# Altium PCB REF-Unit.PcbDoc
Units mm, origin at the board's own origin, x right, y up, seen from the top; angles counter-clockwise.
Board outline 28.96 x 18.29 mm, 4 copper layers (Top1, Signal2, Gnd3, Bottom4), stack 1.043 mm thick; 43 components, 73 nets, 248 pads, 219 vias.
Unrouted connection lines stored in the file: 57.
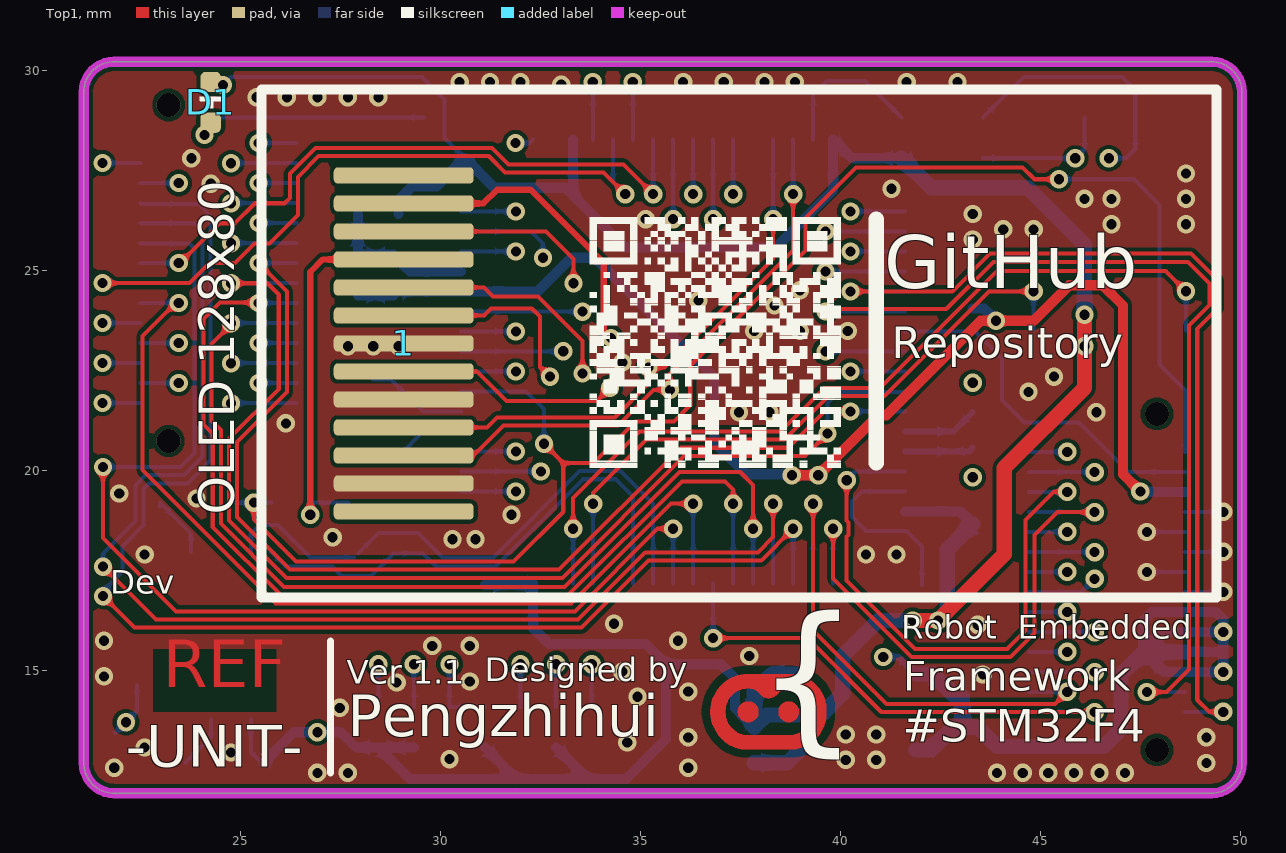
[diagram p0: Top1 view]
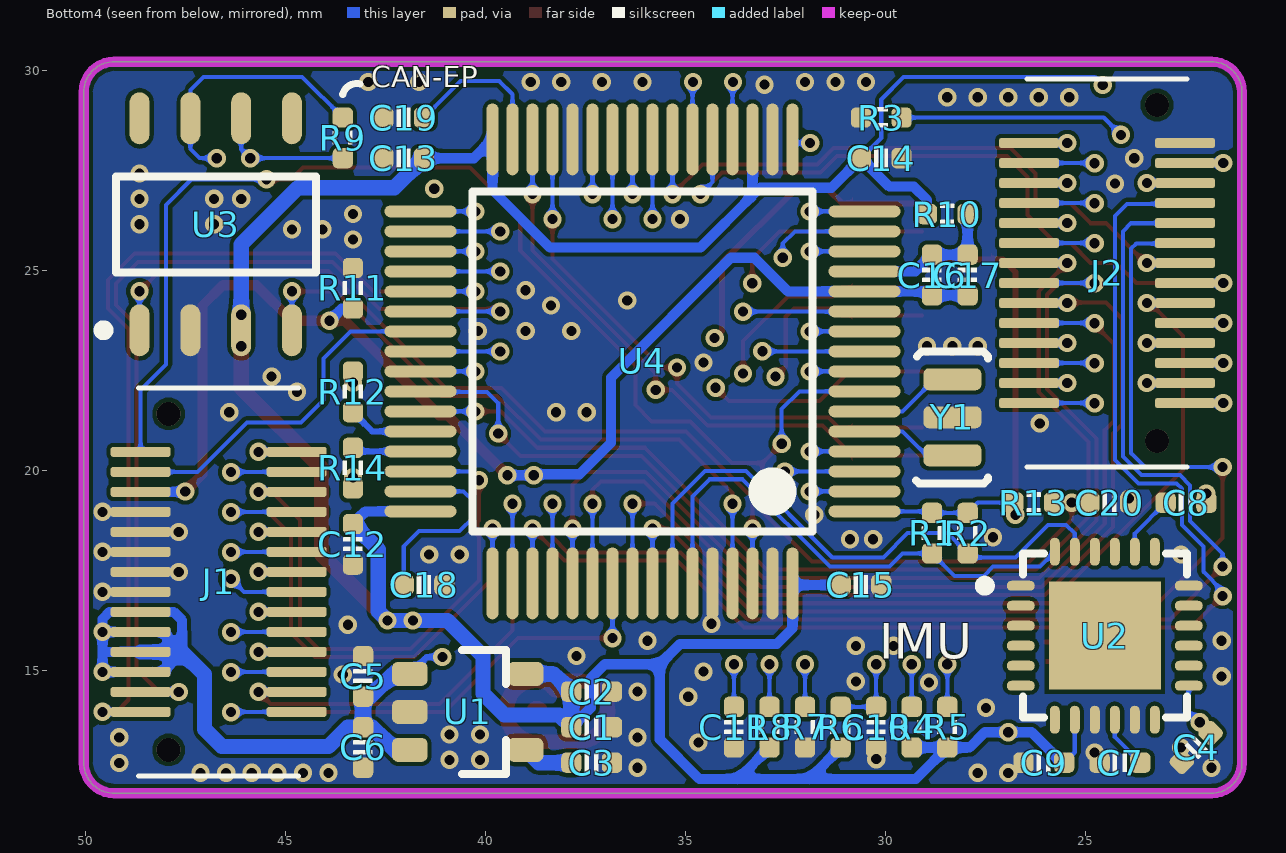
[diagram p1: Bottom4 view, seen from below]
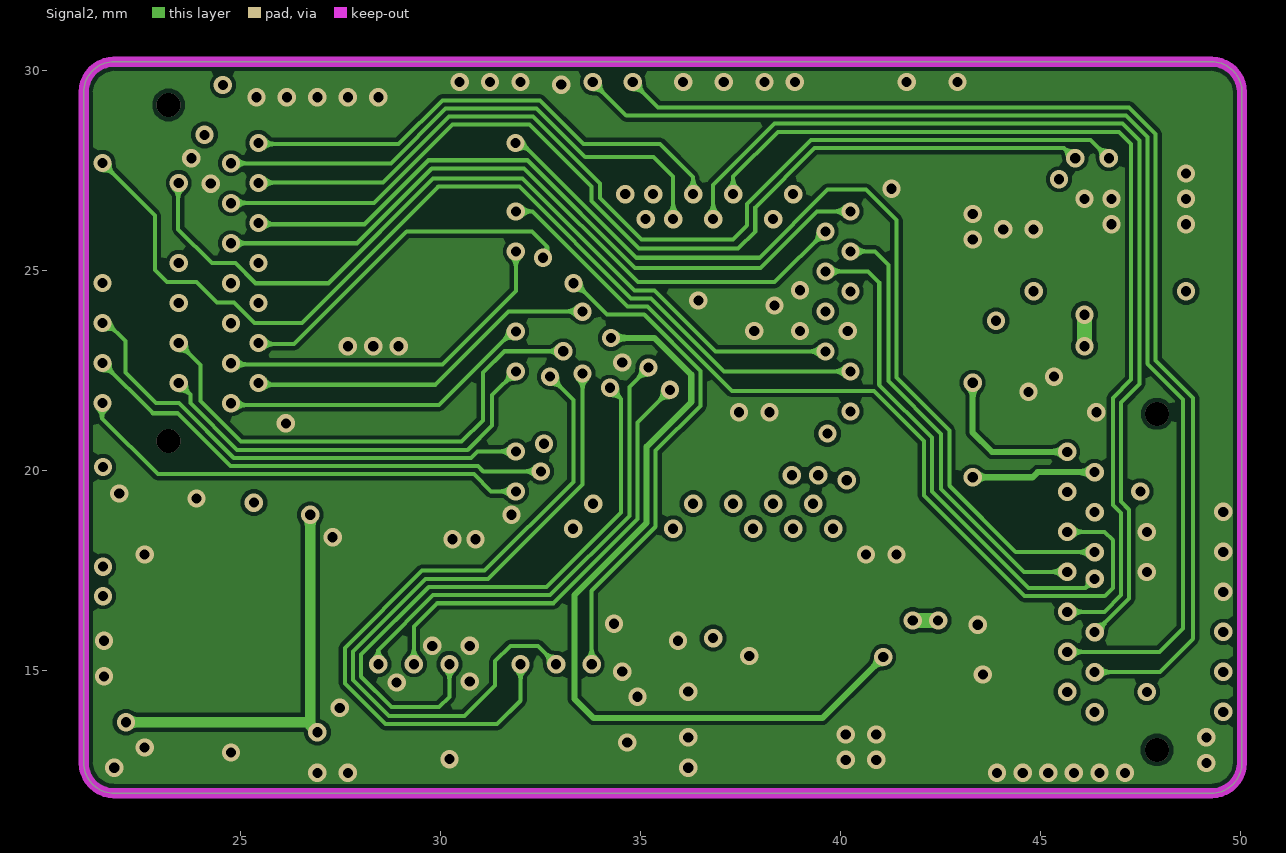
[diagram p2: Signal2]
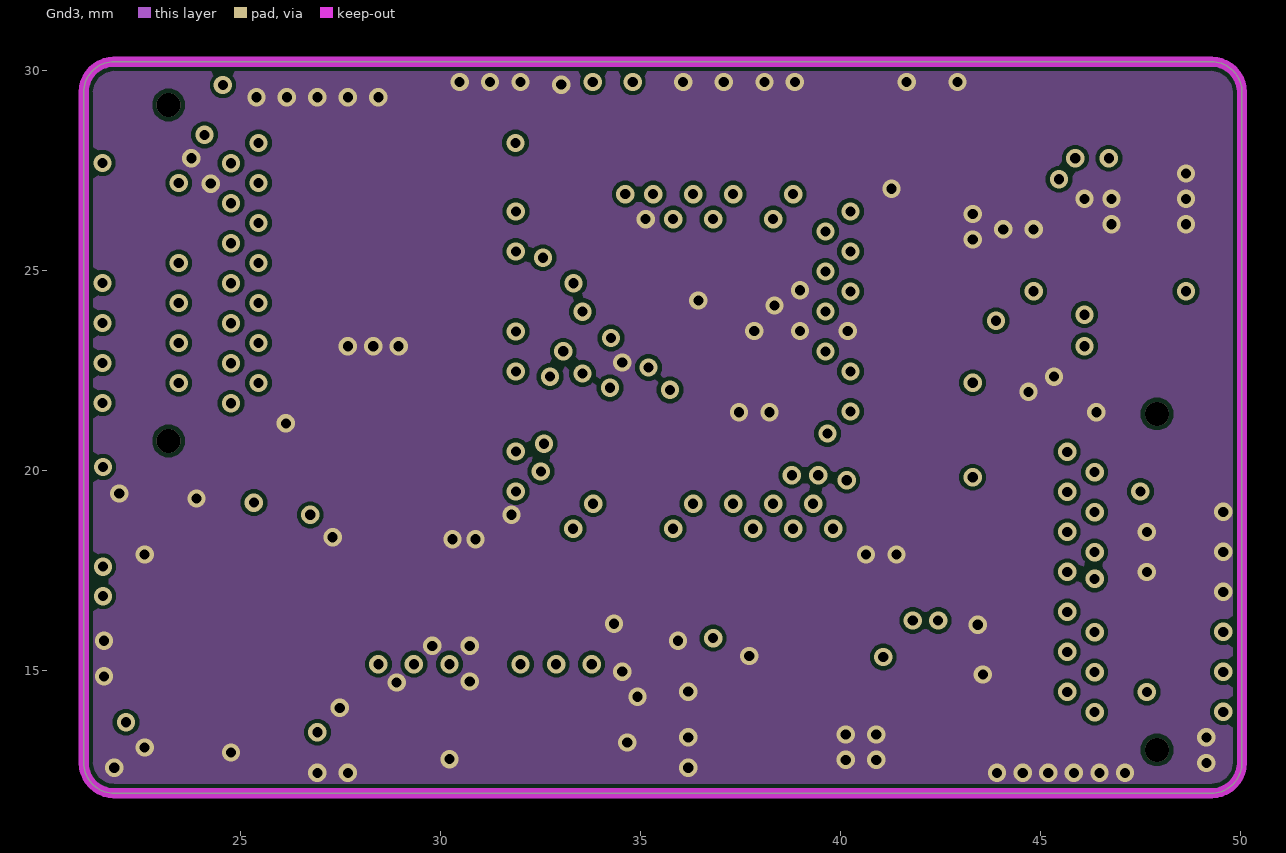
[diagram p3: Gnd3]
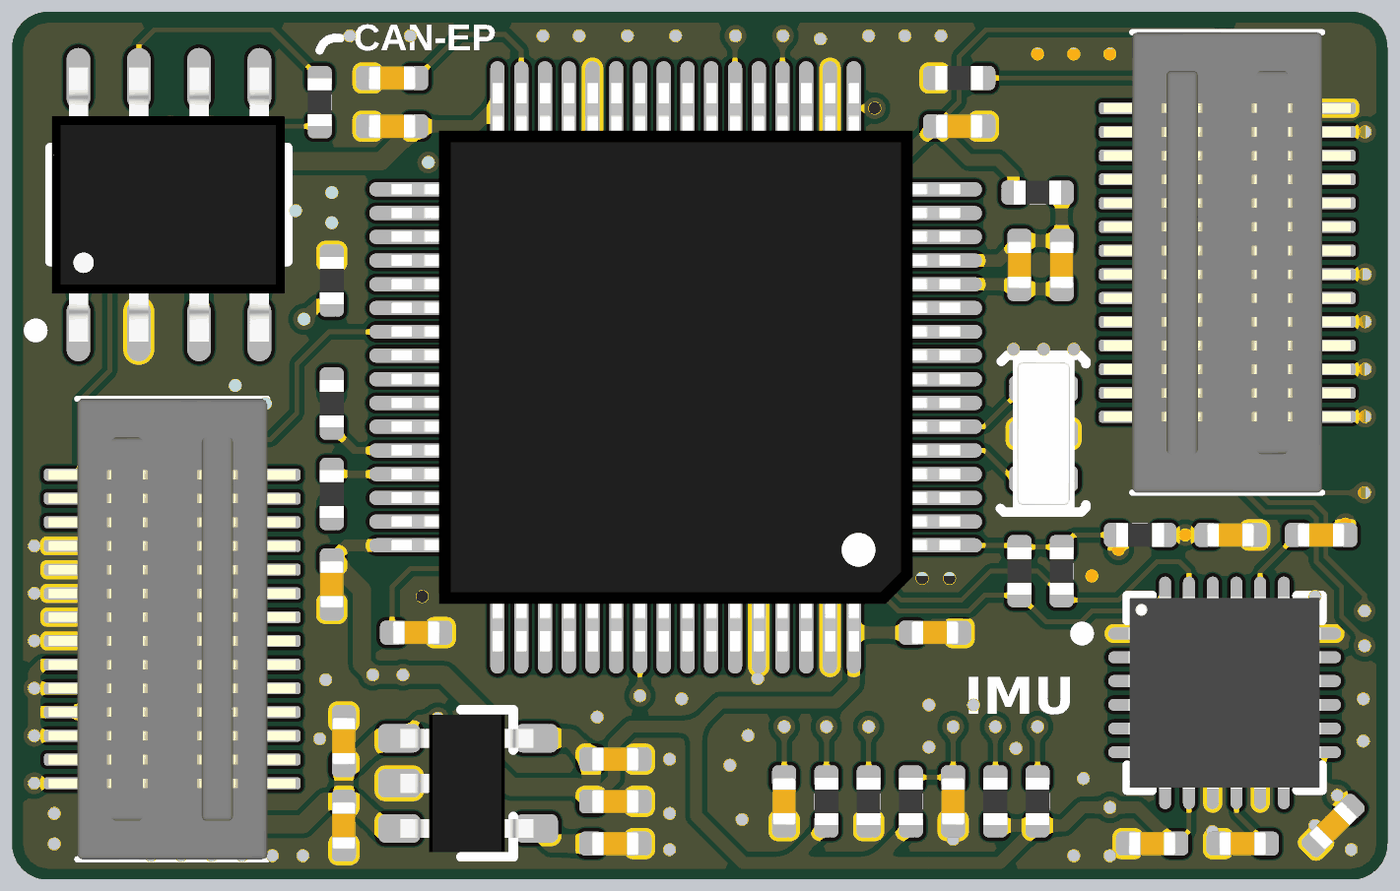
[diagram p4: 3D render of the assembled board from below, using the file's embedded part models]

## Layer stack, top to bottom
Top Solder: solder mask 0.0102, Solder Resist, Dk 3.5
Top1: signal copper 0.0356
Dielectric1: core 0.3, FR-4, Dk 4.2
Signal2: signal copper 0.036
Dielectric 4: prepreg 0.3, Dk 4.2
Gnd3: signal copper 0.036
Dielectric 3: core 0.3, Dk 4.2
Bottom4: signal copper 0.0356
Bottom Solder: solder mask 0.0102, Solder Resist, Dk 3.5

## Board outline
21.082,12.7 ccw(c21.844,12.7) 21.844,11.938 49.276,11.938 ccw(c49.276,12.7) 50.038,12.7 50.038,29.464 ccw(c49.276,29.464) 49.276,30.226 21.844,30.226 ccw(c21.844,29.464) 21.082,29.464

## Design rules (kind name [scope] priority, off if disabled: settings)
Clearance Clearance_Logo [InNetClass('Logo')] p1: gap=0.203 ignorepadtopadclearanceinfootprint=FALSE
Clearance [All] p2: gap=0.102 ignorepadtopadclearanceinfootprint=FALSE except(0: Arc-Hole Track-Hole SMDPad-Hole THPad-Hole Via-Hole Fill-Hole Poly-Hole Region-Hole Text-Hole)
ComponentClearance [All] p1: gap=0 collisioncheckmode=3 verticalgap=0 showdistances=FALSE
DiffPairsRouting [All] p1: maxlimit=0.229 minlimit=0.229 mostfreqgap=0.229 toplayer_minwidth=0.381 toplayer_maxwidth=0.381 toplayer_prefwidth=0.381 midlayer1_minwidth=0.381 midlayer1_maxwidth=0.381 midlayer1_prefwidth=0.381 midlayer2_minwidth=0.381 midlayer2_maxwidth=0.381 midlayer2_prefwidth=0.381 bottomlayer_minwidth=0.381 bottomlayer_maxwidth=0.381 bottomlayer_prefwidth=0.381 maxuncoupledlength=12.7
FanoutControl Fanout_BGA [All] p1: bgadir=Out bgaviamode=Centered fanoutstyle=Auto fanoutdirection=Alternating viagrid=0.025 // Fanout_BGA (Default Rule)
HoleSize [All] p1: absolutevalues=TRUE maxlimit=254 minlimit=0.203 maxpercent=80.000 minpercent=20.000
MinimumSolderMaskSliver [All] p1 off: minsoldermaskwidth=0.051
PlaneClearance [All] p1: clearance=0.203
PlaneConnect [All] p1: planeconnectstyle=Direct reliefexpansion=0.508 reliefentries=4 reliefconductorwidth=0.254 reliefairgap=0.254
PolygonConnect [All] p1: connectstyle=Direct reliefconductorwidth=0.254 reliefentries=4 polygonreliefangle="90 Angle" airgapwidth=0.254
RoutingVias [All] p1: holewidth=0.203 width=0.406 viastyle="Through Hole" minholewidth=0.152 minwidth=0.305 maxholewidth=0.711 maxwidth=1.27
SilkToSilkClearance [All] p1: silktosilkclearance=0
SilkToSolderMaskClearance [IsPad] p1: minsilkscreentomaskgap=0 clearancetoexposedcopper=TRUE
SolderMaskExpansion [All] p1: expansion=0.076 istentingtop=FALSE
Width Logo [InNetClass('Logo')] p1: maxlimit=2.54 minlimit=0.003 preferedwidth=0.254
Width GND [(InNet('AGND') OR InNet('GND'))] p2: maxlimit=1.27 minlimit=0.102 preferedwidth=0.254
Width VCC [(InNet('VDD_SYS_3.3V') OR InNet('VDD_AV_3.3V') OR InNet('VDD_5V') OR InNet('VDD1V2-SYS') OR InNet('VDD1V1-EPHY') OR InNet('VDD-CPUX') OR InNet('VDD-CPUS') OR InNet('VDD-CPUFB') OR InNet('VCC-DRAM'))] p3: maxlimit=1.27 minlimit=0.102 preferedwidth=0.254
Width [All] p4: maxlimit=254 minlimit=0.102 preferedwidth=0.102
21 further rules are at their usual default settings.

## Classes and differential pairs
net class Logo: LOGO1 LOGO2 LOGO3
net class Encoder: ENCODER1_A_1 ENCODER1_B_1 ENCODER2_A_1 ENCODER2_B_1
net class CAN: CAN1_H_1 CAN1_L_1 CAN2_D_1 CAN2_R_1
net class GPIO: PA4_1 PA6_1 PB0_1 PB1_1 PC0_1 PC1_1 PC8_1 PC13_1 PC14_1 PC15_1
net class ADC: ADC1_1 ADC2_1 ADC3_1 ADC4_1
net class PWM: PWM_A1_1 PWM_A2_1 PWM_B1_1 PWM_B2_1
net class I2C: I2C_SCL_1 I2C_SDA_1
net class SPI: SPI1_MISO_1 SPI1_MOSI_1 SPI1_SCK_1 SPI3_MISO_1 SPI3_MOSI_1 SPI3_SCK_1
net class UART: UART1_Rx_1 UART1_Tx_1 UART4_Rx_1 UART4_Tx_1 UART5_Rx_1 UART5_Tx_1
net class USB: USB_DM_1 USB_DP_1

## Components (designator, comment, footprint, x,y, rotation, side; value= is the part's Value field where it differs from the comment)
1 "OLED-12880" OLED-12880 29.083,23.182 r180 top locked
C1 "0.1uF" CAP_0402 37.338,13.589 r0 bottom value=0.1u
C2 "10uF" CAP_0402 37.338,14.478 r0 bottom value=0.1u
C3 "10nF" CAP_0402 37.338,12.7 r0 bottom value=0.1u
C4 "10nF" CAP_0402 22.225,13.081 r315 bottom value=0.1u
C5 "10uF" CAP_0402 43.053,14.859 r270 bottom value=0.1u
C6 "0.1uF" CAP_0402 43.053,13.081 r90 bottom value=0.1u
C7 "0.1uF" CAP_0402 24.13,12.7 r0 bottom value=0.1u
C8 "2.2nF" CAP_0402 22.479,19.202 r0 bottom value=0.1u
C9 "0.1uF" CAP_0402 26.035,12.7 r180 bottom value=0.1u
C10 "10uF" CAP_0402 30.226,13.589 r90 bottom value=0.1u
C11 "10uF" CAP_0402 33.782,13.589 r90 bottom value=0.1u
C12 "0.1uF" CAP_0402 43.307,18.161 r90 bottom value=0.1u
C13 "0.1uF" CAP_0402 42.037,27.813 r180 bottom value=0.1u
C14 "0.1uF" CAP_0402 30.099,27.813 r0 bottom value=0.1u
C15 "0.1uF" CAP_0402 30.607,17.145 r0 bottom value=0.1u
C16 "0.1uF" CAP_0402 28.829,24.892 r90 bottom value=0.1u
C17 "10uF" CAP_0402 27.94,24.892 r90 bottom value=0.1u
C18 "10uF" CAP_0402 41.529,17.145 r0 bottom value=0.1u
C19 "10uF" CAP_0402 42.037,28.829 r180 bottom value=0.1u
C20 "0.1uF" CAP_0402 24.384,19.202 r0 bottom value=0.1u
D1 "color?" LED_0402_RED 24.257,29.21 r270 top
J1 "B2B-Connector-28P-0.5mm" B2B-0.5mm-28P-M 46.666,17.22 r270 bottom locked
J2 "B2B-Connector-28P-0.5mm" B2B-0.5mm-28P-M 24.454,24.944 r90 bottom
R1 "2K" RES_0402 28.829,18.44 r90 bottom value=22R
R2 "2K" RES_0402 27.94,18.44 r90 bottom value=22R
R3 "2K" RES_0402 30.099,28.829 r180 bottom value=22R
R4 "4.7K" RES_0402 29.337,13.589 r270 bottom value=22R
R5 "4.7K" RES_0402 28.448,13.589 r270 bottom value=22R
R6 "10K" RES_0402 31.115,13.589 r270 bottom value=22R
R7 "560K" RES_0402 32.004,13.589 r270 bottom value=22R
R8 "4.7K" RES_0402 32.893,13.589 r270 bottom value=22R
R9 "120R/NC" RES_0402 43.561,28.321 r270 bottom value=22R
R10 "0R" RES_0402 28.448,26.416 r0 bottom value=22R
R11 "0R" RES_0402 43.307,24.562 r90 bottom value=22R
R12 "22R" RES_0402 43.307,21.971 r270 bottom
R13 "10K" RES_0402 26.289,19.202 r0 bottom value=22R
R14 "22R" RES_0402 43.307,20.066 r90 bottom
U1 "LP2992 3V3" SOT23-5 40.386,13.97 r180 bottom
U2 "MPU6050" QFN-24 24.511,15.875 r180 bottom
U3 "SN65HVD232D" SO-8 46.736,26.162 r90 bottom
U4 "STM32F405RGT6" LQFP-64_N 36.068,22.733 r0 bottom locked
Y1 "8MHz" 晶振-3P 28.321,21.336 r90 bottom

## Footprints (in the part's own frame and the unit in brackets; to place one, negate y for a bottom-side part, rotate by r counter-clockwise, add the part's x,y. Pads: shape width x height; smd on the part's side, far side on the other; paste and mask are expansions set on the pad)
B2B-0.5mm-28P-M [mm]
  rrect50% 0.25x1.5 smd: 1(-3.251,1.95) 2(-3.251,-1.95) 3(-2.751,1.95) 4(-2.751,-1.95) 5(-2.251,1.95) 6(-2.251,-1.95) 7(-1.751,1.95) 8(-1.751,-1.95) 9(-1.251,1.95) 10(-1.251,-1.95) 11(-0.751,1.95) 12(-0.751,-1.95) 13(-0.251,1.95) 14(-0.251,-1.95) 15(0.249,1.95) 16(0.249,-1.95) 17(0.749,1.95) 18(0.749,-1.95) 19(1.249,1.95) 20(1.249,-1.95) 21(1.749,1.95) 22(1.749,-1.95) 23(2.249,1.95) 24(2.249,-1.95) 25(2.749,1.95) 26(2.749,-1.95) 27(3.249,1.95) 28(3.249,-1.95)
  round 0.6 hole 0.6 unplated: ""(-4.2,-1.25) ""(4.2,-1.25)
  silkscreen extent -4.85,-2 4.85,2, body extent -4.85,-2.6 4.85,2.6, height 2.7
CAP_0402 [mil]
  rrect50% 20x20 smd: 1(-20,0) 2(20,0)
  silkscreen extent -6,-9 6,9, body extent -20,-10 20,10, height 20
LED_0402_RED [mil]
  rrect50% 20x20 smd: 1(-20,0) 2(20,0)
  silkscreen extent -6,-11 6,10, body extent -20,-10 20,10, height 18
LQFP-64_N [mm] "Thin QFP, 64-Leads, Body 10x10mm, Pitch 0.5mm, IPC Medium Density"
  oval 1.8x0.3 smd: 1(-5.55,3.75) 2(-5.55,3.25) 3(-5.55,2.75) 4(-5.55,2.25) 5(-5.55,1.75) 6(-5.55,1.25) 7(-5.55,0.75) 8(-5.55,0.25) 9(-5.55,-0.25) 10(-5.55,-0.75) 11(-5.55,-1.25) 12(-5.55,-1.75) 13(-5.55,-2.25) 14(-5.55,-2.75) 15(-5.55,-3.25) 16(-5.55,-3.75) 33(5.55,-3.75) 34(5.55,-3.25) 35(5.55,-2.75) 36(5.55,-2.25) 37(5.55,-1.75) 38(5.55,-1.25) 39(5.55,-0.75) 40(5.55,-0.25) 41(5.55,0.25) 42(5.55,0.75) 43(5.55,1.25) 44(5.55,1.75) 45(5.55,2.25) 46(5.55,2.75) 47(5.55,3.25) 48(5.55,3.75)
  oval 0.3x1.8 smd: 17(-3.75,-5.55) 18(-3.25,-5.55) 19(-2.75,-5.55) 20(-2.25,-5.55) 21(-1.75,-5.55) 22(-1.25,-5.55) 23(-0.75,-5.55) 24(-0.25,-5.55) 25(0.25,-5.55) 26(0.75,-5.55) 27(1.25,-5.55) 28(1.75,-5.55) 29(2.25,-5.55) 30(2.75,-5.55) 31(3.25,-5.55) 32(3.75,-5.55) 49(3.75,5.55) 50(3.25,5.55) 51(2.75,5.55) 52(2.25,5.55) 53(1.75,5.55) 54(1.25,5.55) 55(0.75,5.55) 56(0.25,5.55) 57(-0.25,5.55) 58(-0.75,5.55) 59(-1.25,5.55) 60(-1.75,5.55) 61(-2.25,5.55) 62(-2.75,5.55) 63(-3.25,5.55) 64(-3.75,5.55)
  silkscreen extent -4.25,-4.25 4.25,4.25, body extent -5.99,-5.99 5.98,5.98, height 1.6
OLED-12880 [mm]
  rrect50% 3.5x0.4 smd: 1(0,-4.2) 2(0,-3.5) 3(0,-2.8) 4(0,-2.1) 5(0,-1.4) 6(0,-0.7) 7(0,0) 8(0,0.7) 9(0,1.4) 10(0,2.1) 11(0,2.8) 12(0,3.5) 13(0,4.2)
  silkscreen extent -20.32,-6.35 3.56,6.35, body extent -20.18,-6.25 7.54,6.25, height 1.55
QFN-24 [mm] "QFN, 24-Leads, Body 4.1x4.1mm (max), Pitch 0.50mm, IPC Low Density"
  oval 0.7x0.25 smd: 1(-2.1,1.25) 2(-2.1,0.75) 3(-2.1,0.25) 4(-2.1,-0.25) 5(-2.1,-0.75) 6(-2.1,-1.25) 13(2.1,-1.25) 14(2.1,-0.75) 15(2.1,-0.25) 16(2.1,0.25) 17(2.1,0.75) 18(2.1,1.25)
  oval 0.25x0.7 smd: 7(-1.25,-2.1) 8(-0.75,-2.1) 9(-0.25,-2.1) 10(0.25,-2.1) 11(0.75,-2.1) 12(1.25,-2.1) 19(1.25,2.1) 20(0.75,2.1) 21(0.25,2.1) 22(-0.25,2.1) 23(-0.75,2.1) 24(-1.25,2.1)
  rect 2.8x2.7 smd: ""(0,0)
  silkscreen extent -3.13,-2.05 2.05,2.05, body extent -2.02,-2.02 2.02,2.02, height 0.95
RES_0402 [mil]
  rrect50% 20x20 smd: 1(-20,0) 2(20,0)
  silkscreen extent -7,-10 7,10, body extent -20,-10 20,10, height 14
SO-8 [mm]
  oval 1.3x0.5 smd: 1(-2.65,1.905) 2(-2.65,0.635) 3(-2.65,-0.635) 4(-2.65,-1.905) 5(2.65,-1.905) 6(2.65,-0.635) 7(2.65,0.635) 8(2.65,1.905)
  silkscreen extent -2.77,-2.5 1.2,2.93, body extent -2.89,-2.44 2.89,2.46, height 1.45
SOT23-5 [mm] "SOT23, 3-Leads, Body 3.1x3.0mm (max), Pitch 0.95mm, IPC Medium Density"
  rrect50% 0.889x0.6 smd: 1(-1.5,0.95) 2(-1.5,0) 3(-1.5,-0.95) 4(1.396,-0.95) 5(1.396,0.95)
  silkscreen extent -0.2,-1.55 0.9,1.55, body extent -1.48,-1.45 1.32,1.45, height 1.2
晶振-3P [mm] "贴片晶振"
  rrect50% 0.55x1.45 smd: 1(-0.95,0) 2(0,0) 3(0.95,0)
  silkscreen extent -1.65,-0.89 1.65,0.91, body extent -1.6,-0.89 1.65,0.89, height 0.7

## Part data
C1 C2 C3 C4 C5 C6 C7 C8 C9 C10 C11 C12 C13 C14 C15 C16 C17 C18 C19 C20: library part 电容-0402, "Capacitor"
D1: library part LED_0402, "LED", Type=0402
R1 R2 R3 R4 R5 R6 R7 R8 R9 R10 R11 R12 R13 R14: library part 电阻-0402, "Resistor"
U1: library part LP2992, "LDO"
U2: "六轴传感器"
U3: Manufacturer="Texas Instruments", Manufacturer Part Number=SN65HVD232DR, Operating Temperature="-40°C ~ 85°C", Package / Case="8-SOIC (0.154\", 3.90mm Width)", Supplier Device Package=8-SOIC, Supplier Part Number 1=296-26344-2-ND, Voltage - Supply="3 V ~ 3.6 V", Category="Integrated Circuits (ICs)", ComponentLink1Description=http://www.ti.com/lit/ds/symlink/sn65hvd230.pdf, ComponentLink1URL=http://www.ti.com/lit/ds/symlink/sn65hvd230.pdf, Data Rate=1Mbps, Duplex=Half, Mounting Type="Surface Mount", Number of Drivers/Receivers=1/1, Packaging="Tape & Reel (TR)", Part Status=Active, Pricing 1="2500=0.84375 (USD)", Pricing 2="1=2.05, 10=1.842, 100=1.4809, 500=1.21668, 1000=1.00811 (USD)", Protocol=CAN, RoHS="RoHS Compliant", Stock=5000, Supplier 1=Digi-Key, Supplier 2=Digi-Key, Supplier Part Number 2=296-26344-1-ND, Type=Transceiver
U4: "ARM Cortex-M4 32-bit MCU+FPU, 210 DMIPS, 1024 kB Flash, 192 kB Internal RAM, 51 I/Os, 64-pin LQFP, -40 to 85 degC, Tray", I/Os (High Current)=51, Manufacturer=STMicroelectronics, Operating Frequency(F) (Processor speed) (MHz)=168, Supplier Part Number 1=497-11767-ND, Supply Voltage(Vcc) max (V)=3.6, Supply Voltage(Vcc) min (V)=1.8, ComponentLink1Description="Manufacturer URL", ComponentLink1URL=http://www.st.com/web/en/home.html, ComponentLink2Description=Datasheet, ComponentLink2URL=http://www.st.com/st-web-ui/static/active/en/resource/technical/document/datasheet/DM00037051.pdf, ComponentLink3Description="Package Specification", ComponentLink3URL=http://www.st.com/st-web-ui/static/active/en/resource/technical/document/datasheet/DM00037051.pdf, Core="ARM Cortex-M4", D/A Converter=2x12-bit, DatasheetVersion="Rev. 4", FLASH Size (Prog) (kB)=1024, Internal RAM Size (kB)=192, Mounting Technology="Surface Mount", PackageDescription="64-Pin Low Profile Quad Flat Package, 10 x 10 mm Body, 0.5 mm Pitch", PackageReference=LQFP64, PackageVersion="Rev. 4, 06/2013", Packing=Tray, PartNumber=STM32F405RGT6, Supplier 1=Digi-Key, Supplier 2=Farnell, Supplier 3=Newark, Supplier 4=Mouser, Supplier Part Number 2=2064363, Supplier Part Number 3=73T2329, Supplier Part Number 4=511-STM32F405RGT6
Y1: library part 晶振-3Pin, "村田贴片"

## Via types
v1: diameter 0.457, hole 0.254, Top1 to Bottom4, tented both sides, 219 vias

## Nets (pads, with @x,y where several pads share a name; then routed paths per layer and width w, separated by ;. In a path a pad name is that pad's centre, name@x,y a point inside that pad or via, vN(x,y) a via of type N, cw(c..) or ccw(c..) an arc to the next point about the centre after c; other vN are vias at no path point)
3V3: 1.4 C1.2 C2.2 C4.1 C9.2 C12.2 C13.2 C14.2 C15.2 D1.1 R1.2 R2.2 R4.2 R5.2 R6.2 R8.2 R10.2 R13.2 U1.5 U2.8 U2.13 U3.3 U4.1 U4.19 U4.32 U4.48 U4.64 | length 107.9
  Top1 w0.152: v1(26.746,18.898) 26.746,24.968 27.06,25.282 1.4
  Top1 w0.381: v1(41.808,16.256) v1(42.443,16.256) 44.094,17.907 44.094,20.066 46.101,22.073 v1(46.101,23.114) v1(46.101,23.901)
  Signal2 w0.254: v1(22.138,13.713) 26.673,13.713 v1(26.924,13.462) 26.746,13.64 v1(26.746,18.898)
  Signal2 w0.381: v1(41.808,16.256) v1(42.443,16.256) ; v1(46.101,23.114) v1(46.101,23.901)
  Bottom4 w0.102: C4.1 v1(22.138,13.713) 22.411,13.985 U2.13 ; v1(24.562,29.642) 24.765,29.845 29.54,29.845 30.099,29.286 30.099,28.321 C14.2 ; U2.8 25.261,12.966 C9.2 ; v1(26.746,18.898) 26.797,18.948 R13.2 27.686,19.202 R2.2 R1.2 ; R1.2@28.947,18.983 U4.1
  Bottom4 w0.254: C9.2@25.578,12.7 26.34,13.462 v1(26.924,13.462) 27.508,13.462 27.889,13.081 R5.2 ; R10.2 28.956,26.772 29.286,27.102 29.896,27.102 C14.2 31.344,27.076 33.122,27.076 33.318,26.88 ; R4.2 R5.2 ; R6.2 31.902,12.294 ; C15.2 U4.64@32.28,17.145 ; U4.64 32.318,16.059 32.705,15.672 35.128,15.672 35.636,15.164 ; R8.2 33.68,12.294 ; U4.19 33.318,26.88 ; C1.2 37.363,14.072 37.363,14.808 37.008,15.164 35.636,15.164 ; C13.2 40.288,27.813 U4.32 39.818,27.016 38.379,25.578 34.62,25.578 33.318,26.88 ; U4.48 42.993,18.983 C12.2 ; R5.2 29.235,12.294 31.902,12.294 ; 31.902,12.294 33.68,12.294 ; 33.68,12.294 34.646,12.294 35.636,13.284 35.636,15.164
  Bottom4 w0.381: U1.5 38.288,14.92 C2.2 C1.2 38.151,13.894 39.522,13.894 40.056,14.427 40.056,15.367 40.945,16.256 v1(41.808,16.256) v1(42.443,16.256) 42.672,16.485 42.672,18.034 C12.2 ; C13.2 42.266,27.076 44.679,27.076 46.101,25.654 v1(46.101,23.901)
ADC1_1: J2.1 U4.10 | length 10.9
  Signal2 w0.102: v1(24.765,21.687) 24.811,21.641 29.964,21.641 31.806,23.483 v1(31.886,23.483)
  Bottom4 w0.102: v1@24.771,21.693 J2.1 ; U4.10 v1(31.886,23.483)
ADC2_1: J2.3 U4.11 | length 12.9
  Signal2 w0.102: v1(25.451,22.195) 25.497,22.149 29.87,22.149 31.705,23.983 33.548,23.983 v1(33.553,23.978)
  Bottom4 w0.102: v1(25.451,22.195) 25.453,22.193 J2.3 ; U4.11 30.523,23.978 v1(33.553,23.978)
ADC3_1: J2.25 U4.24 | length 17
  Signal2 w0.102: v1(24.765,27.687) v1(24.765,27.687) 28.761,27.686 30.132,29.058 32.401,29.058 33.62,27.838 35.331,27.838 35.818,27.352 v1(35.818,26.29)
  Bottom4 w0.102: v1(24.765,27.687) 24.771,27.693 J2.25 ; v1(35.818,26.29) U4.24
ADC4_1: J2.27 U4.25 | length 14.9
  Signal2 w0.102: v1(25.451,28.195) 25.477,28.169 28.956,28.169 30.048,29.261 32.485,29.261 33.577,28.169 35.488,28.169 36.318,27.338 v1(36.318,26.915)
  Bottom4 w0.102: v1(25.451,28.195) v1(25.451,28.195) J2.27 ; v1(36.318,26.915) U4.25
AGND: C16.1 C17.1 J1.6 R11.1 U4.12 | length 32.2
  Top1 w0.254: v1(38.786,19.888) v1(39.446,19.888) 40.945,21.387 41.148,21.387 43.51,23.749 v1(43.891,23.749) 44.831,23.749 45.72,24.638 46.558,24.638 47.066,24.13 47.066,19.914 v1(47.498,19.482)
  Bottom4 w0.254: C17.1 C16.1 28.928,24.483 U4.12 32.433,24.483 33.274,25.324 33.858,25.324 36.855,22.327 36.855,20.701 37.643,19.914 38.786,19.914 38.811,19.888 v1(39.446,19.888) ; R11.1 43.586,24.054 v1(43.891,23.749) ; v1(47.498,19.482) 47.509,19.471 J1.6
AVCC: C16.2 C17.2 R10.1 U4.13 | length 3.8
  Bottom4 w0.254: R10.1 C17.2 C16.2 29.246,24.983 U4.13
CAN1_D_1: U3.1 U4.62 | length 21
  Top1 w0.102: v1(33.318,18.551) 33.318,19.323 34.976,20.98 38.506,20.98 39.599,22.073 40.996,22.073 43.917,24.994 48.133,24.994 v1(48.641,24.486)
  Bottom4 w0.102: U4.62 v1(33.318,18.551) ; U3.1 v1(48.641,24.486)
CAN1_H_1: J2.23 R9.1 U3.7 | length 32.5
  Signal2 w0.102: v1(25.451,27.195) 25.459,27.203 28.566,27.203 30.217,28.854 32.317,28.854 33.985,27.186 33.985,26.822 35.027,25.781 37.313,25.781 37.668,26.137 37.668,26.67 39.268,28.27 46.253,28.27 v1(46.711,27.813)
  Bottom4 w0.102: v1(25.451,27.195) 25.453,27.193 J2.23 ; R9.1 44.577,29.845 47.041,29.845 47.371,29.515 U3.7 47.371,28.042 47.142,27.813 v1(46.711,27.813)
CAN1_L_1: J2.21 R9.2 U3.6 | length 30
  Signal2 w0.102: v1(24.765,26.687) 24.773,26.695 28.345,26.695 30.301,28.651 32.233,28.651 33.782,27.102 33.782,26.738 34.968,25.552 37.44,25.552 37.871,25.984 37.871,26.586 39.353,28.067 45.588,28.067 45.842,27.813 v1(45.872,27.813)
  Bottom4 w0.102: v1@24.771,26.693 J2.21 ; R9.2 v1(45.872,27.813) 46.101,28.042 U3.6
CAN1_R_1: U3.4 U4.61 | length 16.3
  Top1 w0.102: v1(33.818,19.176) 33.818,19.442 35.154,20.777 38.608,20.777 39.7,21.869 41.097,21.869 43.713,24.486 v1(44.831,24.486)
  Bottom4 w0.102: U4.61 v1(33.818,19.176) ; U3.4 v1(44.831,24.486)
CAN2_D_1: J2.17 U4.34 | length 21
  Signal2 w0.102: v1(24.765,25.687) 27.911,25.687 29.783,27.559 32.09,27.559 34.934,24.714 38.356,24.714 v1(39.625,25.983)
  Bottom4 w0.102: v1@24.771,25.693 J2.17 ; v1(39.625,25.983) U4.34
CAN2_R_1: J2.19 U4.33 | length 19.5
  Signal2 w0.102: v1(25.451,26.195) 25.484,26.162 28.099,26.162 29.699,27.762 32.174,27.762 34.866,25.07 38.006,25.07 39.42,26.483 v1(40.25,26.483)
  Bottom4 w0.102: v1(25.451,26.195) 25.453,26.193 J2.19 ; v1(40.25,26.483) U4.33
ENCODER1_A_1: J1.25 U4.50 | length 13.4
  Top1 w0.102: v1(39.318,19.176) 39.318,16.003 41.148,14.173 45.37,14.173 v1(45.669,14.472)
  Bottom4 w0.102: U4.50 v1(39.318,19.176) ; J1.25 45.667,14.471 v1(45.669,14.472)
ENCODER1_B_1: J1.27 U4.55 | length 13.3
  Top1 w0.102: v1(36.818,15.815) 39.176,15.815 41.021,13.97 46.349,13.97 v1(46.355,13.964)
  Bottom4 w0.102: v1(36.818,15.815) U4.55 ; J1.27 v1@46.349,13.971
ENCODER2_A_1: J1.28 U4.37 | length 23.6
  Top1 w0.102: v1(40.25,24.483) 42.796,24.483 43.739,25.425 48.768,25.425 49.428,24.765 49.428,24.054 48.92,23.546 48.92,14.275 49.223,13.972 v1(49.569,13.972)
  Bottom4 w0.102: v1(40.25,24.483) U4.37 ; J1.28 49.567,13.971 v1(49.569,13.972)
ENCODER2_B_1: J1.26 U4.38 | length 24.4
  Top1 w0.102: v1(39.625,23.983) 39.687,24.045 42.646,24.045 43.823,25.222 48.684,25.222 49.225,24.681 49.225,24.138 48.717,23.63 48.717,15.037 48.149,14.469 v1(47.662,14.469)
  Bottom4 w0.102: v1(39.625,23.983) U4.38 ; v1(47.662,14.469) 47.664,14.471 J1.26
GND: 1.7 1.9 1.12 C1.1 C2.1 C3.1 C4.2 C5.1 C6.1 C7.2 C8.1 C9.1 C10.1 C11.1 C12.1 C13.1 C14.1 C15.1 C18.1 C19.1 C20.1 J1.8 J1.10 J1.12 J1.14 J1.16 J2.28 R3.1 R7.2 R11.2 U1.2 U2.1 U2.9 U2.11 U2.18 U3.2 U4.18 U4.28 U4.60 U4.63 Y1.2 | length 4.8
  Bottom4 w0.102: v1(47.662,17.469) 47.664,17.471 J1.14 ; v1(47.662,18.469) 47.664,18.471 J1.10 ; J1.16 49.567,16.971 v1(49.569,16.972) ; J1.12 49.567,17.971 v1(49.569,17.972) ; J1.8 49.567,18.971 v1(49.569,18.972)
  other v1: 26.924,12.446 27.686,12.446 43.917,12.446 44.557,12.446 45.197,12.446 45.837,12.446 46.477,12.446 47.117,12.446 21.844,12.573 36.195,12.573 49.149,12.695 30.226,12.789 40.132,12.772 40.894,12.772 24.765,12.954 22.606,13.081 34.671,13.208 36.195,13.335 49.149,13.335 40.132,13.407 40.894,13.407 27.483,14.072 34.925,14.351 36.195,14.478 28.905,14.707 30.734,14.732 21.59,14.859 43.561,14.908 34.544,14.977 37.719,15.367 29.794,15.621 30.734,15.621 21.59,15.748 35.941,15.748 43.434,16.151 34.341,16.176 22.606,17.907 40.64,17.907 41.402,17.907 30.302,18.288 30.878,18.288 27.305,18.339 31.775,18.898 23.901,19.304 21.971,19.431 26.137,21.184 37.465,21.463 38.227,21.463 46.399,21.463 44.704,21.971 45.339,22.352 34.544,22.704 27.686,23.114 28.321,23.114 28.956,23.114 37.846,23.495 38.989,23.495 40.184,23.495 38.354,24.13 36.449,24.257 38.989,24.511 43.307,25.781 44.069,26.035 44.831,26.035 46.776,26.162 48.641,26.162 35.131,26.29 43.307,26.416 46.101,26.797 46.776,26.797 48.641,26.797 41.275,27.051 24.257,27.178 48.641,27.432 23.774,27.813 25.4,29.337 26.162,29.337 26.924,29.337 27.686,29.337 28.448,29.337 33.02,29.652 30.48,29.718 31.242,29.718 32.004,29.718 36.068,29.718 37.084,29.718 38.1,29.718 38.862,29.718 41.656,29.718 42.926,29.718
I2C_SCL_1: J2.26 U4.41 | length 26.8
  Signal2 w0.102: v1(21.551,27.695) 22.86,26.386 22.86,25.019 23.165,24.714 23.901,24.714 24.409,24.206 24.841,24.206 25.349,23.698 26.543,23.698 29.947,27.102 31.972,27.102 34.766,24.308 35.264,24.308 37.089,22.483 38.858,22.483 v1(40.25,22.483)
  Bottom4 w0.102: v1(21.551,27.695) 21.553,27.693 J2.26 ; v1(40.25,22.483) U4.41
I2C_SDA_1: J2.24 U4.40 | length 23.7
  Signal2 w0.102: v1(23.458,27.192) 23.444,27.178 23.444,26.035 24.288,25.192 24.872,25.192 25.376,24.687 27.199,24.687 29.817,27.305 32.056,27.305 34.85,24.511 35.348,24.511 36.876,22.983 v1(39.625,22.983)
  Bottom4 w0.102: J2.24 23.456,27.193 v1(23.458,27.192) ; v1(39.625,22.983) U4.40
IMU_SCL_1: R2.1 U2.23 U4.58 | length 14.5
  Bottom4 w0.102: U2.23 25.261,18.428 25.476,18.644 25.933,18.644 26.746,17.831 R2.1@27.838,17.831 ; R2.1 28.448,18.44 29.439,18.44 30.048,17.831 31.324,17.831 33.483,19.99 34.504,19.99 35.318,19.176 U4.58
IMU_SDA_1: R1.1 U2.24 U4.59 | length 12.9
  Bottom4 w0.102: U2.24 26.134,17.602 27.301,17.602 27.529,17.374 28.27,17.374 R1.1 29.566,17.932 29.896,17.602 31.383,17.602 33.567,19.787 34.392,19.787 34.818,19.36 U4.59
LOGO1:  | length 202.5
  Top1 w0.013: 36.751,13.913 37.132,13.913 ; 36.751,13.926 37.132,13.926 ; 36.751,13.938 37.12,13.938 ; 36.751,13.951 37.12,13.951 ; 36.751,13.964 37.12,13.964 ; 36.751,13.976 37.12,13.976 ; 36.751,13.989 37.12,13.989 ; 36.751,14.002 37.12,14.002 ; 36.751,14.014 37.12,14.014 ; 36.751,14.027 37.12,14.027 ; 36.751,14.04 37.132,14.04 ; 36.764,13.837 37.132,13.837 ; 36.764,13.849 37.132,13.849 ; 36.764,13.862 37.132,13.862 ; 36.764,13.875 37.132,13.875 ; 36.764,13.887 37.132,13.887 ; 36.764,13.9 37.132,13.9 ; 36.764,14.053 37.132,14.053 ; 36.764,14.065 37.132,14.065 ; 36.764,14.078 37.132,14.078 ; 36.764,14.091 37.132,14.091 ; 36.764,14.103 37.132,14.103 ; 36.764,14.116 37.132,14.116 ; 36.777,13.748 37.158,13.748 ; 36.777,13.76 37.158,13.76 ; 36.777,13.773 37.158,13.773 ; 36.777,13.786 37.158,13.786 ; 36.777,13.799 37.145,13.799 ; 36.777,13.811 37.145,13.811 ; 36.777,13.824 37.132,13.824 ; 36.777,14.129 37.132,14.129 ; 36.777,14.141 37.132,14.141 ; 36.777,14.154 37.145,14.154 ; 36.777,14.167 37.145,14.167 ; 36.777,14.18 37.158,14.18 ; 36.777,14.192 37.158,14.192 ; 36.777,14.205 37.158,14.205 ; 36.789,13.722 37.17,13.722 ; 36.789,13.735 37.17,13.735 ; 36.789,14.218 37.17,14.218 ; 36.789,14.23 37.17,14.23 ; 36.789,14.243 37.183,14.243 ; 36.789,14.256 37.183,14.256 ; 36.802,13.659 37.208,13.659 ; 36.802,13.672 37.196,13.672 ; 36.802,13.684 37.183,13.684 ; 36.802,13.697 37.183,13.697 ; 36.802,13.71 37.183,13.71 ; 36.802,14.268 37.183,14.268 ; 36.802,14.281 37.196,14.281 ; 36.802,14.294 37.208,14.294 ; 36.802,14.307 37.208,14.307 ; 36.815,13.633 37.234,13.633 ; 36.815,13.646 37.208,13.646 ; 36.815,14.319 37.221,14.319 ; 36.815,14.332 37.234,14.332 ; 36.827,13.595 37.259,13.595 ; 36.827,13.608 37.247,13.608 ; 36.827,13.621 37.234,13.621 ; 36.827,14.345 37.234,14.345 ; 36.827,14.357 37.247,14.357 ; 36.84,13.57 37.272,13.57 ; 36.84,13.583 37.272,13.583 ; 36.84,14.37 37.272,14.37 ; 36.84,14.383 37.272,14.383 ; 36.853,14.395 37.297,14.395 ; 36.866,13.519 37.335,13.519 ; 36.866,13.532 37.323,13.532 ; 36.866,13.545 37.31,13.545 ; 36.866,13.557 37.297,13.557 ; 36.866,14.408 37.297,14.408 ; 36.866,14.421 37.31,14.421 ; 36.866,14.434 37.323,14.434 ; 36.878,13.506 37.348,13.506 ; 36.878,14.446 37.348,14.446 ; 36.891,13.481 37.374,13.481 ; 36.891,13.494 37.374,13.494 ; 36.891,14.459 37.361,14.459 ; 36.891,14.472 37.374,14.472 ; 36.904,13.468 37.412,13.468 ; 36.904,14.484 37.399,14.484 ; 36.904,14.497 37.412,14.497 ; 36.916,13.443 37.462,13.443 ; 36.916,13.456 37.424,13.456 ; 36.916,14.51 37.45,14.51 ; 36.916,14.522 37.462,14.522 ; 36.929,13.43 37.488,13.43 ; 36.929,14.535 37.513,14.535 ; 36.942,13.405 37.577,13.405 ; 36.942,13.418 37.539,13.418 ; 36.942,14.548 37.539,14.548 ; 36.954,13.392 39.456,13.392 ; 36.954,14.561 37.628,14.561 ; 36.967,13.379 39.444,13.379 ; 36.967,14.573 39.456,14.573 ; 36.967,14.586 39.431,14.586 ; 36.98,13.367 39.431,13.367 ; 36.98,14.599 39.431,14.599 ; 36.993,13.354 39.431,13.354 ; 36.993,14.611 39.406,14.611 ; 37.005,13.341 39.406,13.341 ; 37.005,14.624 39.406,14.624 ; 37.018,13.316 39.38,13.316 ; 37.018,13.329 39.393,13.329 ; 37.018,14.637 39.393,14.637 ; 37.031,14.649 39.38,14.649 ; 37.043,13.303 39.367,13.303 ; 37.056,13.291 39.367,13.291 ; 37.056,14.662 39.367,14.662 ; 37.056,14.675 39.355,14.675 ; 37.069,13.278 39.342,13.278 ; 37.069,14.688 39.342,14.688 ; 37.081,13.265 39.342,13.265 ; 37.094,13.252 39.317,13.252 ; 37.094,14.7 39.329,14.7 ; 37.094,14.713 39.317,14.713 ; 37.107,13.24 39.304,13.24 ; 37.12,13.227 39.279,13.227 ; 37.12,14.726 39.291,14.726 ; 37.132,13.214 39.266,13.214 ; 37.132,14.738 39.291,14.738 ; 37.158,13.202 39.253,13.202 ; 37.158,14.751 39.266,14.751 ; 37.158,14.764 39.253,14.764 ; 37.183,13.189 39.24,13.189 ; 37.183,14.776 39.215,14.776 ; 37.196,13.176 39.215,13.176 ; 37.208,13.164 39.19,13.164 ; 37.208,14.789 39.215,14.789 ; 37.234,13.151 39.164,13.151 ; 37.234,14.802 39.177,14.802 ; 37.247,14.815 39.152,14.815 ; 37.259,13.138 39.152,13.138 ; 37.272,14.827 39.126,14.827 ; 37.297,13.125 39.113,13.125 ; 37.297,14.84 39.113,14.84 ; 37.323,13.113 39.101,13.113 ; 37.348,14.853 39.063,14.853 ; 37.361,13.1 39.05,13.1 ; 37.361,14.865 39.05,14.865 ; 37.374,13.087 39.037,13.087 ; 37.412,14.878 38.999,14.878 ; 37.424,13.075 38.974,13.075 ; 37.424,14.891 38.974,14.891 ; 37.462,13.062 38.936,13.062 ; 37.513,14.903 38.885,14.903 ; 37.526,13.049 38.898,13.049 ; 37.589,14.916 38.834,14.916 ; 37.755,14.561 38.656,14.561 ; 37.831,14.548 38.593,14.548 ; 37.856,14.535 38.567,14.535 ; 37.882,14.522 38.542,14.522 ; 37.894,14.51 38.517,14.51 ; 37.92,14.497 38.491,14.497 ; 37.932,14.484 38.478,14.484 ; 37.945,14.472 38.453,14.472 ; 37.97,14.446 38.453,14.446 ; 37.97,14.459 38.453,14.459 ; 37.983,14.434 38.428,14.434 ; 37.996,14.421 38.415,14.421 ; 38.009,14.408 38.402,14.408 ; 38.021,14.395 38.402,14.395 ; 38.034,14.383 38.377,14.383 ; 38.047,14.37 38.364,14.37 ; 38.072,14.345 38.326,14.345 ; 38.072,14.357 38.351,14.357 ; 38.123,14.332 38.288,14.332 ; 38.174,14.319 38.237,14.319 ; 38.783,14.561 39.456,14.561 ; 38.834,13.405 39.469,13.405 ; 38.872,13.418 39.482,13.418 ; 38.872,14.548 39.482,14.548 ; 38.885,14.535 39.482,14.535 ; 38.923,13.43 39.482,13.43 ; 38.936,13.443 39.482,13.443 ; 38.948,14.522 39.494,14.522 ; 38.974,14.51 39.494,14.51 ; 38.986,13.456 39.507,13.456 ; 38.999,13.468 39.507,13.468 ; 38.999,14.497 39.507,14.497 ; 39.012,14.484 39.507,14.484 ; 39.025,13.481 39.52,13.481 ; 39.037,13.494 39.52,13.494 ; 39.037,14.472 39.52,14.472 ; 39.05,14.459 39.533,14.459 ; 39.063,13.506 39.533,13.506 ; 39.063,14.446 39.533,14.446 ; 39.075,13.519 39.533,13.519 ; 39.088,13.532 39.545,13.532 ; 39.088,14.434 39.545,14.434 ; 39.101,13.545 39.558,13.545 ; 39.101,14.421 39.545,14.421 ; 39.113,13.557 39.558,13.557 ; 39.113,14.408 39.558,14.408 ; 39.126,13.57 39.558,13.57 ; 39.126,14.395 39.558,14.395 ; 39.139,13.583 39.571,13.583 ; 39.139,14.383 39.571,14.383 ; 39.152,13.595 39.571,13.595 ; 39.152,14.357 39.583,14.357 ; 39.152,14.37 39.571,14.37 ; 39.164,13.608 39.583,13.608 ; 39.177,13.621 39.596,13.621 ; 39.177,13.633 39.596,13.633 ; 39.177,14.345 39.583,14.345 ; 39.19,13.646 39.596,13.646 ; 39.19,14.319 39.596,14.319 ; 39.19,14.332 39.596,14.332 ; 39.202,13.659 39.596,13.659 ; 39.202,14.307 39.596,14.307 ; 39.215,13.672 39.609,13.672 ; 39.215,13.684 39.609,13.684 ; 39.215,14.268 39.621,14.268 ; 39.215,14.281 39.609,14.281 ; 39.215,14.294 39.609,14.294 ; 39.228,13.697 39.621,13.697 ; 39.228,13.71 39.621,13.71 ; 39.228,14.256 39.621,14.256 ; 39.24,13.722 39.621,13.722 ; 39.24,13.735 39.621,13.735 ; 39.24,14.205 39.621,14.205 ; 39.24,14.218 39.621,14.218 ; 39.24,14.23 39.621,14.23 ; 39.24,14.243 39.621,14.243 ; 39.253,13.748 39.634,13.748 ; 39.253,13.76 39.634,13.76 ; 39.253,13.773 39.634,13.773 ; 39.253,14.18 39.634,14.18 ; 39.253,14.192 39.634,14.192 ; 39.266,13.786 39.634,13.786 ; 39.266,13.799 39.634,13.799 ; 39.266,13.811 39.647,13.811 ; 39.266,13.824 39.647,13.824 ; 39.266,14.129 39.647,14.129 ; 39.266,14.141 39.647,14.141 ; 39.266,14.154 39.647,14.154 ; 39.266,14.167 39.647,14.167 ; 39.279,13.837 39.647,13.837 ; 39.279,13.849 39.647,13.849 ; 39.279,13.862 39.647,13.862 ; 39.279,13.875 39.647,13.875 ; 39.279,14.078 39.647,14.078 ; 39.279,14.091 39.647,14.091 ; 39.279,14.103 39.647,14.103 ; 39.279,14.116 39.647,14.116 ; 39.291,13.887 39.647,13.887 ; 39.291,13.9 39.647,13.9 ; 39.291,13.913 39.647,13.913 ; 39.291,13.926 39.647,13.926 ; 39.291,13.938 39.647,13.938 ; 39.291,13.951 39.647,13.951 ; 39.291,13.964 39.647,13.964 ; 39.291,13.976 39.647,13.976 ; 39.291,13.989 39.647,13.989 ; 39.291,14.002 39.647,14.002 ; 39.291,14.014 39.647,14.014 ; 39.291,14.027 39.647,14.027 ; 39.291,14.04 39.647,14.04 ; 39.291,14.053 39.647,14.053 ; 39.291,14.065 39.647,14.065
LOGO2:  | length 16.4
  Top1 w0.013: 37.437,13.951 37.945,13.951 ; 37.437,13.964 37.945,13.964 ; 37.437,13.976 37.945,13.976 ; 37.437,13.989 37.945,13.989 ; 37.437,14.002 37.945,14.002 ; 37.437,14.014 37.945,14.014 ; 37.45,13.887 37.945,13.887 ; 37.45,13.9 37.945,13.9 ; 37.45,13.913 37.945,13.913 ; 37.45,13.926 37.945,13.926 ; 37.45,13.938 37.945,13.938 ; 37.45,14.027 37.945,14.027 ; 37.45,14.04 37.945,14.04 ; 37.45,14.053 37.945,14.053 ; 37.45,14.065 37.945,14.065 ; 37.45,14.078 37.932,14.078 ; 37.462,13.862 37.932,13.862 ; 37.462,13.875 37.932,13.875 ; 37.462,14.091 37.932,14.091 ; 37.475,14.103 37.92,14.103 ; 37.475,14.116 37.92,14.116 ; 37.488,13.837 37.92,13.837 ; 37.488,13.849 37.92,13.849 ; 37.488,14.129 37.907,14.129 ; 37.488,14.141 37.894,14.141 ; 37.501,13.824 37.894,13.824 ; 37.513,13.799 37.869,13.799 ; 37.513,13.811 37.882,13.811 ; 37.513,14.154 37.882,14.154 ; 37.513,14.167 37.882,14.167 ; 37.526,13.786 37.856,13.786 ; 37.539,14.18 37.856,14.18 ; 37.551,13.773 37.831,13.773 ; 37.551,14.192 37.843,14.192 ; 37.564,13.76 37.831,13.76 ; 37.577,14.205 37.818,14.205 ; 37.589,13.748 37.805,13.748 ; 37.589,14.218 37.805,14.218 ; 37.615,13.735 37.767,13.735 ; 37.615,14.23 37.78,14.23 ; 37.64,13.722 37.742,13.722
LOGO3:  | length 16.5
  Top1 w0.013: 38.453,13.887 38.936,13.887 ; 38.453,13.9 38.948,13.9 ; 38.453,13.913 38.948,13.913 ; 38.453,13.926 38.961,13.926 ; 38.453,13.938 38.961,13.938 ; 38.453,13.951 38.961,13.951 ; 38.453,13.964 38.961,13.964 ; 38.453,13.976 38.961,13.976 ; 38.453,13.989 38.961,13.989 ; 38.453,14.002 38.961,14.002 ; 38.453,14.014 38.961,14.014 ; 38.453,14.027 38.961,14.027 ; 38.453,14.04 38.961,14.04 ; 38.453,14.053 38.948,14.053 ; 38.453,14.065 38.948,14.065 ; 38.466,14.078 38.936,14.078 ; 38.466,14.091 38.936,14.091 ; 38.478,13.849 38.923,13.849 ; 38.478,13.862 38.936,13.862 ; 38.478,13.875 38.936,13.875 ; 38.478,14.103 38.936,14.103 ; 38.478,14.116 38.923,14.116 ; 38.491,13.837 38.91,13.837 ; 38.491,14.129 38.91,14.129 ; 38.504,13.811 38.898,13.811 ; 38.504,13.824 38.91,13.824 ; 38.504,14.141 38.91,14.141 ; 38.504,14.154 38.885,14.154 ; 38.529,13.799 38.885,13.799 ; 38.529,14.167 38.885,14.167 ; 38.542,13.786 38.872,13.786 ; 38.542,14.18 38.859,14.18 ; 38.555,14.192 38.859,14.192 ; 38.567,13.76 38.834,13.76 ; 38.567,13.773 38.847,13.773 ; 38.58,14.205 38.821,14.205 ; 38.593,13.748 38.821,13.748 ; 38.605,14.218 38.809,14.218 ; 38.618,14.23 38.796,14.23 ; 38.631,13.735 38.783,13.735 ; 38.656,13.722 38.758,13.722
Net1_3: 1.3 C11.2 | length 18.7
  Top1 w0.102: 1.3 32.641,25.982 33.325,25.298 v1(33.325,24.689)
  Signal2 w0.102: v1(33.325,24.689) 33.381,24.689 34.168,23.901 35.096,23.901 36.5,22.497 36.5,21.622 35.382,20.505 35.382,18.6 33.782,17 v1(33.782,15.164)
  Bottom4 w0.102: C11.2 v1(33.782,15.164)
Net1_5: 1.5 R8.1 | length 24.5
  Top1 w0.102: 1.5 31.095,24.582 31.318,24.359 32.436,24.359 33.553,23.241 v1(33.553,22.428)
  Signal2 w0.102: v1(32.893,15.164) 32.436,15.621 31.75,15.621 31.369,15.24 31.369,14.63 30.607,13.868 28.71,13.868 27.813,14.765 27.813,15.486 29.624,17.297 31.191,17.297 33.553,19.66 v1(33.553,22.428)
  Bottom4 w0.102: R8.1 v1@32.893,15.113
Net1_6: 1.6 R7.1 | length 23.4
  Top1 w0.102: 1.6 31.096,23.882 31.267,24.054 32.283,24.054 32.487,23.851 32.487,22.606 v1(32.741,22.352)
  Signal2 w0.102: v1(32.004,15.164) 32.004,14.249 31.42,13.665 28.626,13.665 27.61,14.681 27.61,15.57 29.54,17.501 31.107,17.501 33.325,19.718 33.325,21.768 v1(32.741,22.352)
  Bottom4 w0.102: R7.1 v1(32.004,15.164)
Net1_8: 1.8 C10.2 R6.1 | length 22.8
  Top1 w0.102: 1.8 30.909,22.482 31.648,21.742 33.909,21.742 v1(34.239,22.073)
  Signal2 w0.102: v1(30.226,15.164) 30.226,14.348 29.967,14.089 28.777,14.089 28.016,14.85 28.016,15.402 29.709,17.094 32.655,17.094 34.519,18.957 34.519,21.793 v1(34.239,22.073)
  Bottom4 w0.102: v1(30.226,15.164) C10.2 R6.1
NetC3_2: C3.2 U1.4 | length 1.3
  Bottom4 w0.381: C3.2 38.67,12.7 U1.4
NetC7_1: C7.1 U2.10 | length 1.3
  Bottom4 w0.102: C7.1 24.261,13.339 U2.10
NetC8_2: C8.2 U2.20 | length 1.6
  Bottom4 w0.102: C8.2@22.987,19.101 C8.2 23.761,18.428 U2.20
NetC18_2: C18.2 U4.47 | length 4.8
  Bottom4 w0.102: U4.47 40.54,19.483 40.284,19.228 40.284,18.847 40.64,18.491 41.656,18.491 42.037,18.11 C18.2
NetC19_2: C19.2 U4.31 | length 3.9
  Bottom4 w0.102: U4.31 39.318,29.412 39.649,29.743 40.615,29.743 C19.2
NetD1_2: D1.2 R3.2 | length 5.7
  Bottom4 w0.102: v1(24.105,28.397) 24.536,28.829 R3.2
NetU4_5: U4.5 Y1.1 | length 2.4
  Bottom4 w0.102: Y1.1 28.971,20.386 29.568,20.983 U4.5
NetU4_6: U4.6 Y1.3 | length 2.5
  Bottom4 w0.102: Y1.3 28.768,22.286 29.571,21.483 U4.6
NRST_1: C20.2 J1.2 R13.1 U4.7 | length 40.9
  Top1 w0.102: v1(25.336,19.202) 25.336,18.783 26.391,17.729 31.826,17.729 33.071,18.974 33.071,20.193 ; v1(32.588,20.676) 33.071,20.193 ; v1(45.466,27.287) 44.849,27.287 44.552,27.584 40.386,27.584 39.124,26.322 39.124,25.51 36.246,22.631 36.246,21.641 35.839,21.234 34.874,21.234 33.833,20.193 33.071,20.193
  Bottom4 w0.102: C20.2 v1(25.336,19.202) R13.1 ; U4.7 32.144,21.983 32.588,21.539 v1(32.588,20.676) ; v1(45.466,27.287) 47.338,27.287 47.981,26.645 47.981,22.657 48.616,22.022 J1.2
OLED_SCL_1: 1.10 R5.1 U4.29 | length 27.2
  Top1 w0.102: 1.10 31.166,21.082 31.42,21.336 34.358,21.336 35.204,22.182 v1(35.204,22.581) 35.603,22.581 38.318,25.296 v1(38.318,26.29)
  Signal2 w0.102: v1(28.448,15.164) 28.448,15.519 29.82,16.891 32.74,16.891 34.722,18.873 34.722,22.098 v1(35.204,22.581)
  Bottom4 w0.102: R5.1 v1(28.448,15.164) ; v1(38.318,26.29) U4.29
OLED_SDA_1: 1.11 R4.1 U4.30 | length 27.1
  Top1 w0.102: 1.11 30.821,20.382 31.572,21.133 34.442,21.133 35.331,22.022 v1(35.738,22.022) 35.738,22.428 38.818,25.508 v1(38.818,26.915)
  Signal2 w0.102: v1(29.337,15.164) 29.337,16.104 29.921,16.688 32.824,16.688 34.925,18.789 34.925,21.209 v1(35.738,22.022)
  Bottom4 w0.102: R4.1 v1(29.337,15.164) ; v1(38.818,26.915) U4.30
PA4_1: J1.21 U4.20 | length 32.6
  Signal2 w0.102: v1(33.807,29.718) 34.646,28.88 47.134,28.88 47.676,28.338 47.676,22.674 48.565,21.785 48.565,16.057 47.98,15.472 v1(45.669,15.472)
  Bottom4 w0.102: v1(33.807,29.718) 33.818,29.707 U4.20 ; J1.21 45.667,15.471 v1(45.669,15.472)
PA6_1: J1.23 U4.22 | length 32.5
  Signal2 w0.102: v1(34.807,29.718) 35.442,29.083 47.219,29.083 47.879,28.423 47.879,25.476 47.879,22.758 48.819,21.819 48.819,15.799 47.984,14.964 v1(46.355,14.964)
  Bottom4 w0.102: U4.22 v1@34.818,29.707 ; J1.23 v1@46.349,14.971
PB0_1: J1.19 U4.26 | length 28.9
  Signal2 w0.102: v1(36.818,26.29) 36.818,27.141 38.354,28.677 47.05,28.677 47.473,28.254 47.473,22.165 47.015,21.708 47.015,19.228 47.219,19.025 47.219,16.804 46.379,15.964 v1(46.355,15.964)
  Bottom4 w0.102: v1(36.818,26.29) U4.26 ; J1.19 v1@46.349,15.971
PB1_1: J1.17 U4.27 | length 26.4
  Signal2 w0.102: v1(37.318,26.915) 37.318,27.353 38.438,28.473 46.966,28.473 47.269,28.17 47.269,22.276 46.812,21.819 46.812,19.144 47.015,18.94 47.015,16.889 46.599,16.472 v1(45.669,16.472)
  Bottom4 w0.102: v1(37.318,26.915) U4.27 ; J1.17 45.667,16.471 v1(45.669,16.472)
PC0_1: J2.4 U4.8 | length 12.8
  Signal2 w0.102: v1(23.458,22.192) 23.749,21.901 23.749,21.692 24.917,20.523 30.683,20.523 31.293,21.133 31.293,21.89 v1(31.886,22.483)
  Bottom4 w0.102: J2.4 23.456,22.193 v1(23.458,22.192) ; U4.8 v1(31.886,22.483)
PC1_1: J2.8 U4.9 | length 16.3
  Signal2 w0.102: v1(23.458,23.192) 24.003,22.647 24.003,21.742 25.019,20.726 30.531,20.726 31.064,21.26 31.064,22.454 31.598,22.987 v1(33.071,22.987)
  Bottom4 w0.102: J2.8 23.456,23.193 v1(23.458,23.192) ; U4.9 33.067,22.983 v1(33.071,22.987)
PC8_1: J1.4 U4.39 | length 9.1
  Bottom4 w0.102: U4.39 43.37,23.483 44.044,22.809 44.044,21.768 44.602,21.209 45.959,21.209 47.197,19.971 J1.4
PC13_1: J2.2 U4.2 | length 13.8
  Signal2 w0.102: v1@21.539,21.695 21.539,21.311 22.936,19.914 30.836,19.914 31.266,19.483 v1(31.886,19.483)
  Bottom4 w0.102: v1(21.551,21.695) 21.553,21.693 J2.2 ; U4.2 v1(31.886,19.483)
PC14_1: J2.6 U4.3 | length 15
  Signal2 w0.102: v1@21.552,22.695 22.809,21.438 23.428,21.438 24.749,20.117 30.937,20.117 31.071,19.983 v1(32.511,19.983)
  Bottom4 w0.102: v1(21.551,22.695) 21.553,22.693 J2.6 ; U4.3 v1(32.511,19.983)
PC15_1: J2.10 U4.4 | length 14.6
  Signal2 w0.102: v1(21.551,23.695) 21.669,23.695 22.123,23.241 22.123,22.454 22.885,21.692 23.462,21.692 24.833,20.32 30.767,20.32 30.93,20.483 v1(31.886,20.483)
  Bottom4 w0.102: v1(21.551,23.695) 21.553,23.693 J2.10 ; U4.4 v1(31.886,20.483)
PWM_A1_1: J1.9 U4.16 | length 24.6
  Signal2 w0.102: v1(31.886,26.483) 32.304,26.483 34.682,24.105 35.18,24.105 37.288,21.996 40.835,21.996 42.088,20.744 42.088,19.38 44.602,16.866 46.609,16.866 46.812,17.069 46.812,18.263 46.602,18.472 v1(45.669,18.472) v1@45.637,18.44
  Bottom4 w0.102: U4.16 v1(31.886,26.483) ; J1.9 45.667,18.471 v1(45.669,18.472)
PWM_A2_1: J1.11 U4.17 | length 25.4
  Signal2 w0.102: v1(31.877,28.194) 31.877,28.22 31.94,28.283 34.9,25.324 37.973,25.324 39.675,27.026 40.64,27.026 41.402,26.264 41.402,22.327 42.723,21.006 42.723,19.625 44.383,17.964 v1(46.355,17.964)
  Bottom4 w0.102: v1(31.877,28.194) 32.229,28.194 U4.17 ; J1.11 v1@46.349,17.971
PWM_B1_1: J1.13 U4.35 | length 13.6
  Signal2 w0.102: v1(40.25,25.483) 40.862,25.483 41.199,25.146 41.199,22.242 42.52,20.922 42.52,19.541 44.588,17.472 v1(45.669,17.472)
  Bottom4 w0.102: v1(40.25,25.483) U4.35 ; J1.13 45.667,17.471 v1(45.669,17.472)
PWM_B2_1: J1.15 U4.36 | length 16.2
  Signal2 w0.102: v1(39.625,24.983) 40.692,24.983 40.97,24.705 40.97,22.149 42.291,20.828 42.291,19.482 44.704,17.069 46.126,17.069 v1(46.355,17.297)
  Bottom4 w0.102: v1(39.625,24.983) U4.36 ; J1.15 46.028,16.971 v1(46.355,17.297)
SPI1_MISO_1: J2.12 U4.56 | length 23.7
  Top1 w0.102: v1(23.458,24.192) 23.379,24.192 22.555,23.368 22.555,20.015 25.883,16.688 33.274,16.688 35.762,19.176 v1(36.318,19.176)
  Bottom4 w0.102: J2.12 23.456,24.193 v1(23.458,24.192) ; U4.56 v1(36.318,19.176)
SPI1_MOSI_1: J2.16 U4.23 | length 16.2
  Top1 w0.102: v1(23.458,25.192) 23.49,25.192 24.486,26.187 24.867,26.187 25.366,26.687 26.103,26.687 26.238,26.822 26.238,27.432 26.873,28.067 31.293,28.067 31.699,27.661 34.572,27.661 v1(35.318,26.915)
  Bottom4 w0.102: J2.16 23.456,25.193 v1(23.458,25.192) ; v1(35.318,26.915) U4.23
SPI1_SCK_1: J2.14 U4.21 | length 17.8
  Top1 w0.102: v1(21.551,24.695) 21.557,24.689 23.724,24.689 24.232,25.197 24.867,25.197 25.349,25.679 25.73,25.679 26.441,26.391 26.441,27.348 26.957,27.864 31.209,27.864 31.615,27.457 34.078,27.457 v1(34.62,26.915)
  Bottom4 w0.102: v1(21.551,24.695) 21.553,24.693 J2.14 ; U4.21 34.318,27.217 v1(34.62,26.915)
SPI3_MISO_1: J2.20 U4.52 | length 32.6
  Top1 w0.102: v1(21.565,17.602) 22.885,16.281 33.444,16.281 35.12,17.958 37.937,17.958 38.318,18.339 v1(38.318,19.176)
  Bottom4 w0.102: v1(21.565,17.602) 21.565,17.932 22.377,18.745 22.377,19.634 22.631,19.888 23.589,19.888 24.054,20.353 24.054,25.984 23.851,26.187 22.51,26.187 J2.20 ; U4.52 v1(38.318,19.176)
SPI3_MOSI_1: J2.18 U4.57 | length 28
  Top1 w0.102: v1(21.565,20.094) 21.565,18.313 23.393,16.485 33.36,16.485 35.426,18.551 v1(35.818,18.551)
  Bottom4 w0.102: v1(21.565,20.094) 21.567,20.091 23.504,20.091 23.851,20.438 23.851,25.552 23.724,25.679 22.518,25.679 J2.18 ; U4.57 v1(35.818,18.551)
SPI3_SCK_1: J2.22 U4.51 | length 33
  Top1 w0.102: v1(21.565,16.866) 22.352,16.078 33.528,16.078 35.204,17.755 38.021,17.755 v1(38.818,18.551)
  Bottom4 w0.102: v1(21.565,16.866) 21.565,16.993 22.047,17.475 22.047,18.11 22.581,18.644 22.581,19.55 22.716,19.685 23.673,19.685 24.257,20.269 24.257,26.372 23.959,26.67 22.528,26.67 J2.22 ; U4.51 v1(38.818,18.551)
SWCLK_1: J1.7 U4.49 | length 14.5
  Top1 w0.102: v1(39.818,18.551) 39.818,17.307 41.783,15.342 44.255,15.342 44.856,15.943 44.856,18.39 45.431,18.964 v1(46.355,18.964)
  Bottom4 w0.102: U4.49 v1(39.818,18.551) ; J1.7 v1@46.349,18.971
SWDIO_1: J1.5 U4.46 | length 14.5
  Top1 w0.102: v1(40.157,19.761) 40.157,18.751 40.199,18.709 40.199,18.393 40.157,18.352 40.157,17.255 41.867,15.545 44.171,15.545 44.628,16.002 44.628,18.771 45.33,19.472 v1(45.669,19.472)
  Bottom4 w0.102: v1(40.157,19.761) 40.379,19.983 U4.46 ; J1.5 45.667,19.471 v1(45.669,19.472)
UART1_Rx_1: J2.15 U4.43 | length 27
  Top1 w0.102: v1(25.451,25.195) 25.5,25.146 26.162,24.484 26.162,21.963 24.917,20.718 24.917,18.845 26.237,17.526 32.963,17.526 36.011,20.574 38.692,20.574 39.601,21.483 v1(40.25,21.483)
  Bottom4 w0.102: v1(25.451,25.195) 25.453,25.193 J2.15 ; v1(40.25,21.483) U4.43
UART1_Tx_1: J2.13 U4.42 | length 29
  Top1 w0.102: v1(24.765,24.687) 25.671,24.687 25.959,24.4 25.959,22.047 24.714,20.803 24.714,18.761 26.153,17.323 33.047,17.323 36.095,20.371 39.116,20.371 v1(39.675,20.93)
  Bottom4 w0.102: v1@24.771,24.693 J2.13 ; v1(39.675,20.93) 39.675,21.692 39.954,21.971 41.606,21.971 U4.42
UART4_Rx_1: J2.7 U4.15 | length 12.4
  Signal2 w0.102: v1(25.451,23.195) 25.481,23.165 26.34,23.165 29.158,25.983 32.285,25.983 32.664,25.603 32.664,25.425 v1(32.563,25.324)
  Bottom4 w0.102: v1(25.451,23.195) 25.453,23.193 J2.7 ; U4.15 32.259,25.983 32.563,25.679 v1(32.563,25.324)
UART4_Tx_1: J2.5 U4.14 | length 11.9
  Signal2 w0.102: v1(24.765,22.687) 24.795,22.657 30.048,22.657 31.886,24.495 v1(31.886,25.483)
  Bottom4 w0.102: v1@24.771,22.693 J2.5 ; U4.14 v1(31.886,25.483)
UART5_Rx_1: J2.11 U4.54 | length 25.1
  Top1 w0.102: v1(25.451,24.195) 25.44,24.206 24.486,24.206 24.079,23.8 24.079,21.158 24.308,20.93 24.308,18.593 26.01,16.891 33.19,16.891 36.035,19.736 37.109,19.736 37.318,19.527 v1(37.318,19.176)
  Bottom4 w0.102: v1(25.451,24.195) v1(25.451,24.195) J2.11 ; U4.54 v1(37.318,19.176)
UART5_Tx_1: J2.9 U4.53 | length 24.7
  Top1 w0.102: v1(24.765,23.687) 24.765,23.647 24.282,23.165 24.282,21.242 24.511,21.014 24.511,18.677 26.094,17.094 33.106,17.094 35.976,19.964 37.496,19.964 37.818,19.642 v1(37.818,18.551)
  Bottom4 w0.102: v1@24.771,23.693 J2.9 ; U4.53 v1(37.818,18.551)
USB_DM_1: J1.1 R12.1 | length 4.8
  Signal2 w0.152: v1(43.307,22.2) 43.307,20.955 43.79,20.472 v1(45.669,20.472)
  Bottom4 w0.102: J1.1 45.667,20.471 v1(45.669,20.472)
USB_DM_IN_1: R12.2 U4.44 | length 1.9
  Bottom4 w0.152: U4.44 42.827,20.983 R12.2
USB_DP_1: J1.3 R14.1 | length 4.7
  Signal2 w0.152: v1(43.307,19.837) 44.806,19.837 44.933,19.964 v1(46.355,19.964)
  Bottom4 w0.102: J1.3 46.349,19.971 v1(46.355,19.964)
USB_DP_IN_1: R14.2 U4.45 | length 1.7
  Bottom4 w0.152: U4.45 43.216,20.483 R14.2
VIN: 1.2 C5.2 C6.2 J1.18 J1.20 J1.22 J1.24 U1.1 U1.3 | length 49.8
  Top1 w0.152: 1.2 31.076,26.682 31.42,27.026 32.255,27.026 34.083,25.197 34.083,23.498 v1(34.265,23.317)
  Signal2 w0.152: v1(34.265,23.317) 35.357,23.317 36.271,22.403 36.271,21.717 35.154,20.599 35.154,18.694 33.35,16.891 33.35,14.3 33.833,13.818 39.548,13.818 v1(41.072,15.342)
  Bottom4 w0.152: v1(41.072,15.342) 41.464,15.342 U1.1
  Bottom4 w0.254: J1.22 49.567,15.471 49.569,15.472 ; 47.576,15.471 47.576,16.258 47.789,16.471 J1.18 49.392,16.471 49.569,16.293 v1(49.569,15.972) ; 47.576,15.471 48.076,15.971 J1.20 49.567,15.971 v1(49.569,15.972) ; 47.576,15.471 48.076,14.971 J1.24 49.567,14.971 v1(49.569,14.972) 49.569,15.472 ; 49.569,15.472 v1(49.569,15.972)
  Bottom4 w0.381: U1.3 42.255,13.02 42.824,13.589 C6.2 ; U1.1 42.306,14.92 42.875,14.351 C5.2 C6.2 ; J1.22 47.576,15.471 47.015,14.91 47.015,13.538 46.584,13.106 43.917,13.106 43.434,13.589 C6.2
pads on no net: 1.1 1.13 J1. J2. U2. U2.2 U2.3 U2.4 U2.5 U2.6 U2.7 U2.12 U2.14 U2.15 U2.16 U2.17 U2.19 U2.21 U2.22 U3.5 U3.8

## Polygon pours and split planes (outlines as drawn)
GND on Gnd3 "GND_L03_P000" (solid, remove dead copper, pour order 0): 21.082,30.226 50.038,30.226 50.038,11.938 21.082,11.938
GND on Bottom4 "GND_L04_P001" (solid, remove dead copper, pour order 1): 21.082,30.226 50.038,30.226 50.038,11.938 21.082,11.938
GND on Signal2 "GND_L02_P002" (solid, remove dead copper, pour order 2): 21.082,30.226 50.038,30.226 50.038,11.938 21.082,11.938
GND on Top1 "GND_L01_P003" (solid, remove dead copper, pour order 3): 21.082,30.226 50.038,30.226 50.038,11.938 21.082,11.938

## Keep-outs
Keep-Out Layer:
  the board outline again, w0.254

## Other copper
Top1:
  text "REF" at 23.055,14.199 h2.03

## Silkscreen, mask and mechanical layers (free items; w line width, h text height)
Top Overlay:
  drawing of 2306 lines, arcs and shapes, not listed
  text "GitHub" at 41.096,24.128 h2.29
  text "Repository" at 41.279,22.553 h1.35
  text "OLED 128x80" at 25.146,18.898 h1.52 r90
  text "Dev" at 21.742,16.728 h1.02
  text "Robot  Embedded" at 41.516,15.596 h1.02
  text "Designed by" at 31.111,14.537 h1.02
  text "Ver 1.1" at 27.655,14.478 h1.02
  text "Framework" at 41.567,14.249 h1.27
  text "Pengzhihui" at 27.682,13.013 h1.78
  text "#STM32F4" at 41.554,12.954 h1.4
  text "{" at 37.896,12.456 h5.08
  text "-UNIT-" at 22.139,12.251 h1.78
Bottom Overlay:
  lines w0.178: 43.129,29.667 cw(c43.218,29.324) 43.561,29.413
  text "CAN-EP" at 42.85,29.413 h0.89
  text "IMU" at 30.151,14.994 h1.52
Top Solder:
  rectangle: 22.581,13.767 26.162,15.748
  region: 22.098,29.845 21.463,28.575 22.733,28.575
  lines w2.286: 37.683,13.976 38.725,13.989
Mechanical 1:
  the board outline again, w0.254
Drill Drawing:
  circle w0.254: c23.663,40.255 r0.847
  lines w0.254: 22.817,44.911 24.51,44.911 23.663,43.218 22.817,44.911
  lines w0.381: 21.298,38.265 337.643,38.265 ; 21.298,45.885 337.643,45.885 ; 35.29,34.455 35.29,49.695 ; 50.526,34.455 50.526,49.695 ; 78.458,34.455 78.458,49.695 ; 91.307,34.455 91.307,49.695 ; 109.946,34.455 109.946,49.695 ; 140.163,34.455 140.163,49.695 ; 155.145,34.455 155.145,49.695 ; 174.088,34.455 174.088,49.695 ; 190.594,34.455 190.594,49.695 ; 212.28,34.455 212.28,49.695 ; 246.153,34.455 246.153,49.695 ; 280.027,34.455 280.027,49.695 ; 302.017,34.455 302.017,49.695 ; 21.298,34.455 337.643,34.455 337.643,49.695 21.298,49.695 21.298,34.455
  text "Symbol" at 23.584,47.028 h1.83
  text "Count" at 36.433,47.028 h1.83
  text "Hole Size" at 51.669,47.028 h1.83
  text "Plated" at 79.601,47.028 h1.83
  text "Hole Type" at 92.45,47.028 h1.83
  text "Drill Layer Pair" at 111.089,47.028 h1.83
  text "Via/Pad" at 141.306,47.028 h1.83
  text "Pad Shape" at 156.288,47.028 h1.83
  text "Template" at 175.231,47.028 h1.83
  text "Description" at 191.737,47.028 h1.83
  text "Hole Tolerance (+)" at 213.423,47.028 h1.83
  text "Hole Tolerance (-)" at 247.296,47.028 h1.83
  text "Hole Length" at 281.17,47.028 h1.83
  text "Routed Path Length" at 303.16,47.028 h1.83
  text "4" at 36.433,43.218 h1.52
  text "23.62mil (0.600mm)" at 51.669,43.218 h1.52
  text "NPTH" at 79.601,43.218 h1.52
  text "Round" at 92.45,43.218 h1.52
  text "Top1 - Bottom4" at 111.089,43.218 h1.52
  text "Pad" at 141.306,43.218 h1.52
  text "Rounded" at 156.288,43.218 h1.52
  text "c60hn60" at 175.231,43.218 h1.52
  text "-" at 281.17,43.218 h1.52
  text "-" at 303.16,43.218 h1.52
  text "219" at 36.433,39.408 h1.52
  text "10.00mil (0.254mm)" at 51.669,39.408 h1.52
  text "PTH" at 79.601,39.408 h1.52
  text "Round" at 92.45,39.408 h1.52
  text "Top1 - Bottom4" at 111.089,39.408 h1.52
  text "Via" at 141.306,39.408 h1.52
  text "Rounded" at 156.288,39.408 h1.52
  text "(Mixed)" at 175.231,39.408 h1.52
  text "-" at 281.17,39.408 h1.52
  text "-" at 303.16,39.408 h1.52
  text "223 Total" at 36.433,35.598 h1.52